# EAGLE board PCB Layout 1 (EAGLE 9.3.2)
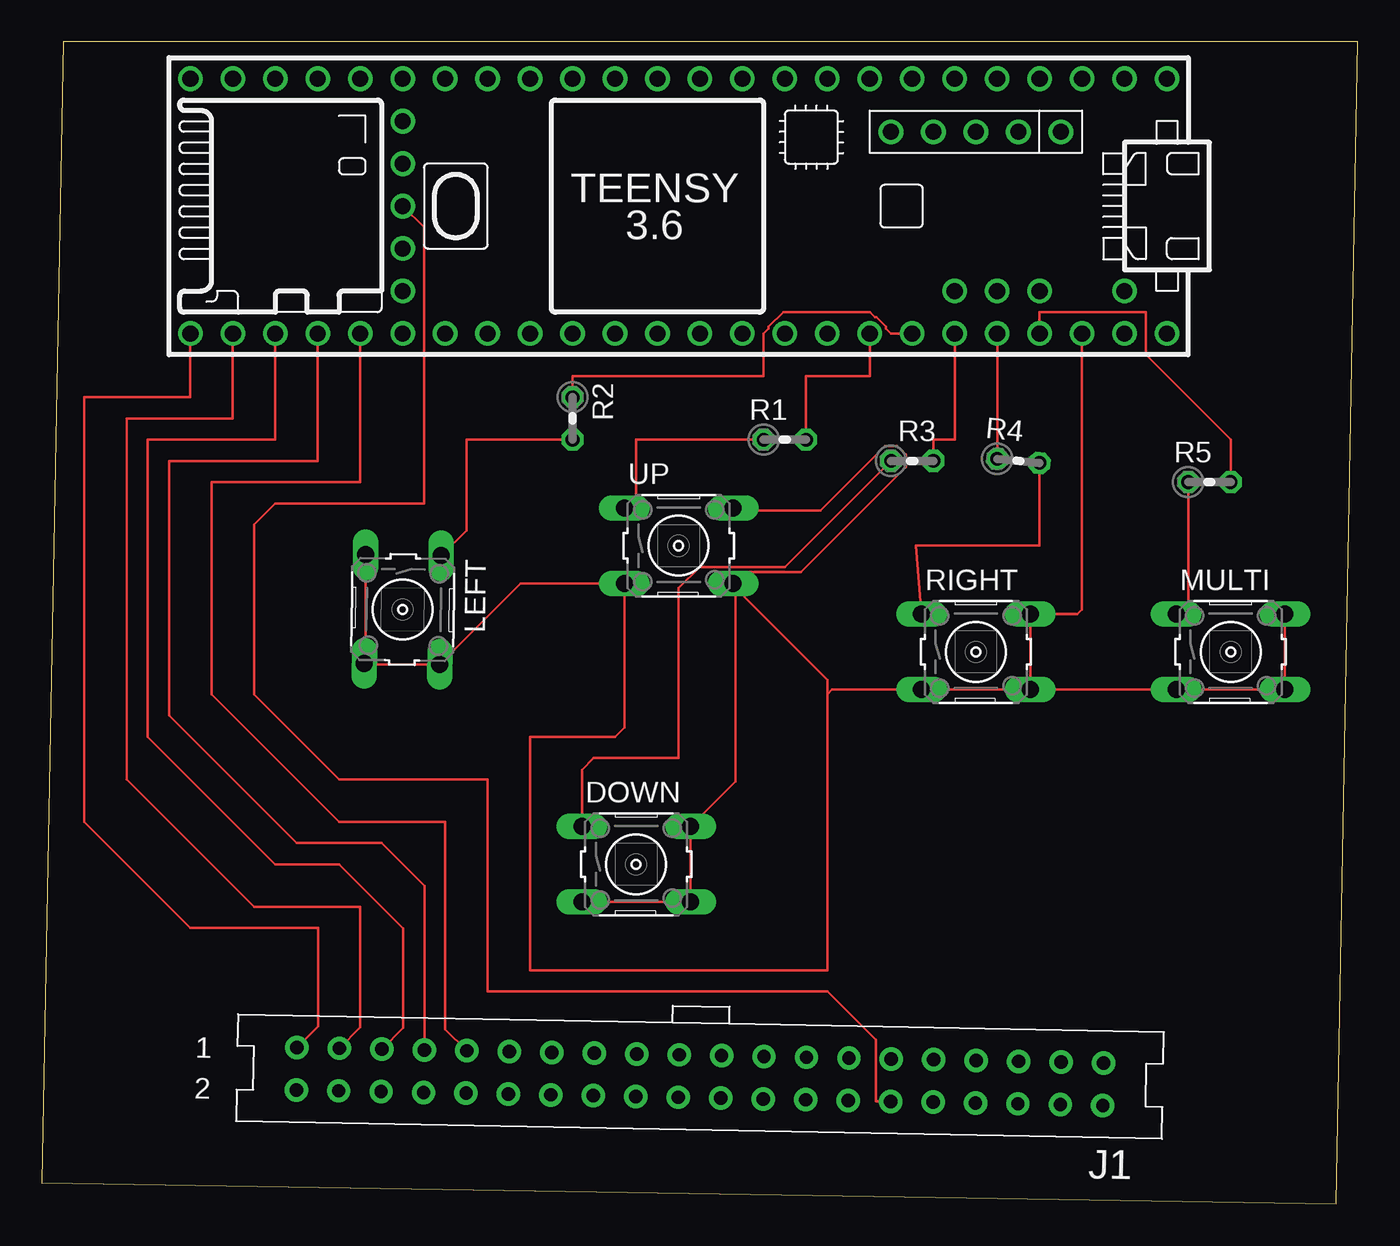
[diagram p0: board, top side]

Size 78.72 x 69.52 mm. Coordinates in mm from the lower left corner, seen from the top.
Outline: 0,1.27 77.45,0 78.72,69.52 1.27,69.52 0,1.27
Copper layers (1*16): Top 0.035mm / dielectric 1.5mm / Bottom 0.035mm
Design rules "default": minimum track width 6mil, minimum drill 0.35mm, track to track 6mil, track to pad 6mil, pad to pad 6mil, via to via 6mil, smd to smd 6mil, copper to edge 40mil, drill to drill 6mil, minimum pad ring 10mil, minimum via ring 8mil, stop-mask expansion 4mil, vias tented up to drill 0mil, thermal gap 10mil

## Footprints (pad centres in the part's own frame; a part is rotated, then mirrored left to right if it is on the bottom)
B3F-10XX = drill 1.016 long: 1 -3.251,2.261; 2 3.251,2.261; 3 -3.251,-2.261; 4 3.251,-2.261
S40V = drill 0.8 pad 1.4: 1 24.13,-1.27; 2 24.13,1.27; 3 21.59,-1.27; 4 21.59,1.27; 5 19.05,-1.27; 6 19.05,1.27; 7 16.51,-1.27; 8 16.51,1.27; 9 13.97,-1.27; 10 13.97,1.27; 11 11.43,-1.27; 12 11.43,1.27; 13 8.89,-1.27; 14 8.89,1.27; 15 6.35,-1.27; 16 6.35,1.27; 17 3.81,-1.27; 18 3.81,1.27; 19 1.27,-1.27; 20 1.27,1.27; 21 -1.27,-1.27; 22 -1.27,1.27; 23 -3.81,-1.27; 24 -3.81,1.27; 25 -6.35,-1.27; 26 -6.35,1.27; 27 -8.89,-1.27; 28 -8.89,1.27; 29 -11.43,-1.27; 30 -11.43,1.27; 31 -13.97,-1.27; 32 -13.97,1.27; 33 -16.51,-1.27; 34 -16.51,1.27; 35 -19.05,-1.27; 36 -19.05,1.27; 37 -21.59,-1.27; 38 -21.59,1.27; 39 -24.13,-1.27; 40 -24.13,1.27
0204V = drill 0.813 octagon: 1 -1.27,0; 2 1.27,0
TEENSY_3.5/3.6 = drill 0.965: 0/RX -25.4,-7.62; 1/TX -22.86,-7.62; 2 -20.32,-7.62; 3/CANTX -17.78,-7.62; 3V3 7.62,-7.62; 3V3_2 17.78,-2.54; 3V3_LO -22.86,7.62; 4/CANRX -15.24,-7.62; 5 -12.7,-7.62; 6 -10.16,-7.62; 7 -7.62,-7.62; 8 -5.08,-7.62; 9/CS -2.54,-7.62; 10/CS 0,-7.62; 11/MOSI 2.54,-7.62; 12/MISO 5.08,-7.62; 13/SCK 5.08,7.62; 14/A0 2.54,7.62; 15/A1 0,7.62; 16/A2 -2.54,7.62; 17/A3 -5.08,7.62; 18/A4/SDA -7.62,7.62; 19/A5/SCL -10.16,7.62; 20/A6 -12.7,7.62; 21/A7 -15.24,7.62; 21/DAC0 12.7,7.62; 22/A8 -17.78,7.62; 23/A9 -20.32,7.62; 24 10.16,-7.62; 25 12.7,-7.62; 26 15.24,-7.62; 27 17.78,-7.62; 28 20.32,-7.62; 29 22.86,-7.62; 30 25.4,-7.62; 31/A12 27.94,-7.62; 32/A13 30.48,-7.62; 33/A14 30.48,7.62; 34/A15 27.94,7.62; 35/A16 25.4,7.62; 36/A17 22.86,7.62; 37/A18 20.32,7.62; 38/A19 17.78,7.62; 39/A20 15.24,7.62; A10 -17.78,5.08; A11 -15.24,5.08; A22/DAC1 10.16,7.62; AGND -25.4,7.62; AREF -20.32,5.08; GND -27.94,-7.62; GND2 7.62,7.62; GND3 17.78,0; PROG 17.78,2.54; RESET 17.78,5.08; U5V -21.59,-4.445; UD+ -16.51,-4.445; UD- -19.05,-4.445; UGND1 -13.97,-4.445; UGND2 -11.43,-4.445; VBAT 17.78,-5.08; VIN -27.94,7.62; VUSB -25.4,5.08

## Placement (x,y rotation side)
DOWN  27k  [B3F-10XX]  35.56,20.32 0 top
J1  [S40V]  39.37,7.62 178.9 top
LEFT  27k  [B3F-10XX]  21.59,35.56 269.3 top
MULTI  27k  [B3F-10XX]  71.12,33.02 0 top
R1  27k  [0204V]  44.45,45.72 0 top
R2  27k  [0204V]  31.75,46.99 270 top
R3  27k  [0204V]  52.07,44.45 0 top
R4  27k  [0204V]  58.42,44.45 354.5 top
R5  27k  [0204V]  69.85,43.18 0 top
RIGHT  27k  [B3F-10XX]  55.88,33.02 0 top
U$2  TEENSY_3.5/3.6  [TEENSY_3.5/3.6]  39.37,59.69 180 top
UP  27k  [B3F-10XX]  38.1,39.37 0 top

## Library data of the parts
DOWN LEFT MULTI RIGHT UP = switch-omron; MPN: B3F-1000; OC_FARNELL: 176432; OC_NEWARK: 36M3542
J1 = con-3m-skt-header
R1-R5 = rcl; SPICEPREFIX: R
U$2 = Teensy356

## Nets
0: DOWN.2 DOWN.3 DOWN.4 LEFT.2 LEFT.3 LEFT.4 MULTI.2 MULTI.3 MULTI.4 RIGHT.2 RIGHT.3 RIGHT.4 U$2.3V3_LO UP.2 UP.3 UP.4
N$1: J1.30 U$2.GND3
N$2: R1.1 UP.1
N$3: LEFT.1 R2.2
N$4: R4.2 RIGHT.1
N$5: MULTI.1 R5.1
N$6: DOWN.1 R3.1
N$8: R4.1 U$2.22/A8
N$10: J1.1 U$2.33/A14
N$11: J1.3 U$2.34/A15
N$12: J1.5 U$2.35/A16
N$13: J1.7 U$2.36/A17
N$14: J1.9 U$2.37/A18
N$15: R5.2 U$2.23/A9
N$17: R3.2 U$2.21/A7
N$18: R2.1 U$2.20/A6
N$19: R1.2 U$2.19/A5/SCL

## Tracks (layer width: path | path; a pad name or v marks a point on that pad's centre or on a via)
0
  Top 0.152: RIGHT.4 MULTI.3 MULTI.4 MULTI.2 | RIGHT.4 RIGHT.3 47.27,30.76 46.99,30.48 | U$2.3V3_LO 62.23,35.56 61.95,35.28 RIGHT.2 RIGHT.4 | LEFT.3 19.37,32.42 LEFT.4 19.35,32.28 LEFT.2 28.64,37.11 UP.3 34.85,28.5 34.29,27.94 29.21,27.94 29.21,13.97 46.99,13.97 46.99,30.48 | 41.49,36.83 41.49,25.26 DOWN.2 DOWN.4 DOWN.3 | 41.49,37.25 41.49,36.83 | 46.99,30.48 46.99,31.33 41.49,36.83 | UP.2 41.49,41.49 46.58,41.49 50.43,45.34 51.17,45.34 51.69,44.82 51.69,44.08 45.4,37.79 42.04,37.79 41.49,37.25 | UP.4 41.49,37.25
N$1
  Top 0.152: U$2.GND3 22.86,58.42 22.86,41.91 13.97,41.91 12.7,40.64 12.7,30.48 17.78,25.4 26.67,25.4 26.67,12.7 46.99,12.7 49.89,9.8 49.89,6.13 J1.30
N$2
  Top 0.152: UP.1 35.56,42.34 35.56,45.72 R1.1
N$3
  Top 0.152: LEFT.1 25.4,40.29 25.4,45.72 R2.2
N$4
  Top 0.152: R4.2 59.69,39.37 52.28,39.37 RIGHT.1
N$5
  Top 0.152: R5.1 68.58,35.99 MULTI.1
N$6
  Top 0.152: R3.1 44.45,38.1 39.37,38.1 38.1,36.83 38.1,26.67 33.02,26.67 32.31,25.96 DOWN.1
N$8
  Top 0.152: U$2.22/A8 R4.1
N$10
  Top 0.152: U$2.33/A14 8.89,48.26 2.54,48.26 2.54,22.86 8.89,16.51 16.54,16.51 16.54,10.62 J1.1
N$11
  Top 0.152: U$2.34/A15 11.43,46.99 5.08,46.99 5.08,25.4 12.7,17.78 19.05,17.78 19.05,10.55 J1.3
N$12
  Top 0.152: U$2.35/A16 13.97,45.72 6.35,45.72 6.35,27.94 13.97,20.32 17.78,20.32 21.62,16.48 21.62,10.52 J1.5
N$13
  Top 0.152: U$2.36/A17 16.51,44.45 7.62,44.45 7.62,29.21 15.24,21.59 20.32,21.59 22.89,19.02 J1.7
N$14
  Top 0.152: U$2.37/A18 19.05,43.18 10.16,43.18 10.16,30.48 17.78,22.86 24.13,22.86 24.13,10.45 J1.9
N$15
  Top 0.152: R5.2 71.12,45.72 66.04,50.8 66.04,53.34 59.69,53.34 U$2.23/A9
N$17
  Top 0.152: U$2.21/A7 54.61,45.72 53.34,45.72 R3.2
N$18
  Top 0.152: U$2.20/A6 50.8,52.07 50.49,52.37 50.49,52.47 49.93,53.04 49.84,53.04 49.53,53.34 44.36,53.34 43.48,52.47 43.48,52.37 43.18,52.07 43.18,49.53 31.75,49.53 R2.1
N$19
  Top 0.152: R1.2 45.72,49.53 49.53,49.53 U$2.19/A5/SCL